# EAGLE board Ex Pin Expander (EAGLE 7.4.0)
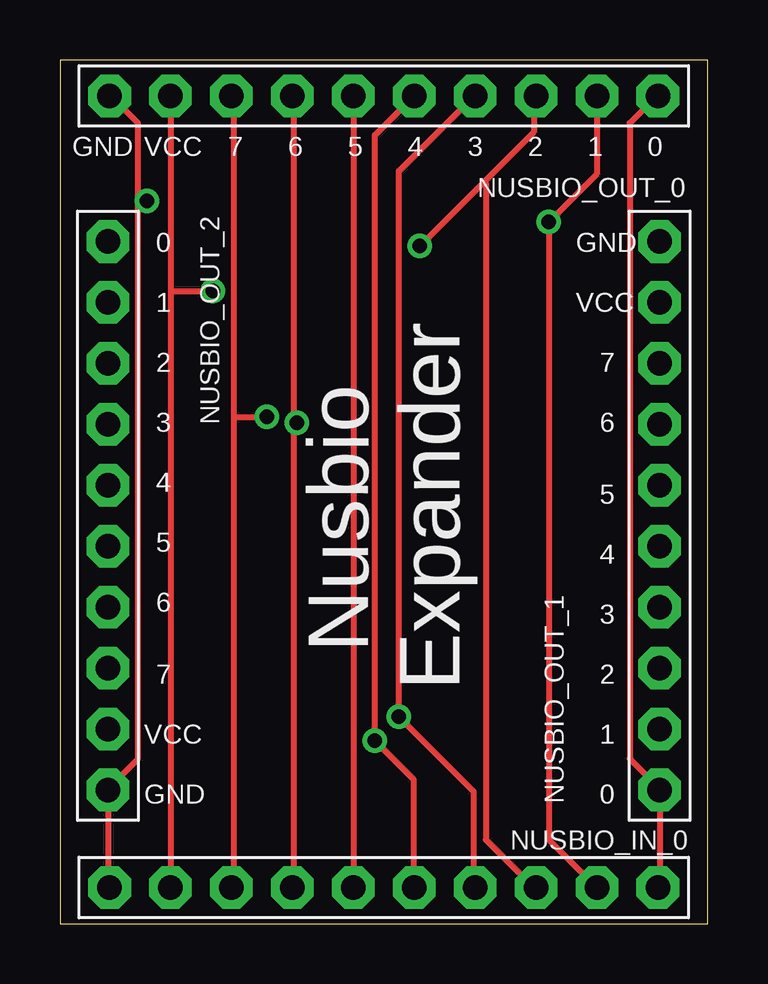
[diagram p0: board, top side]
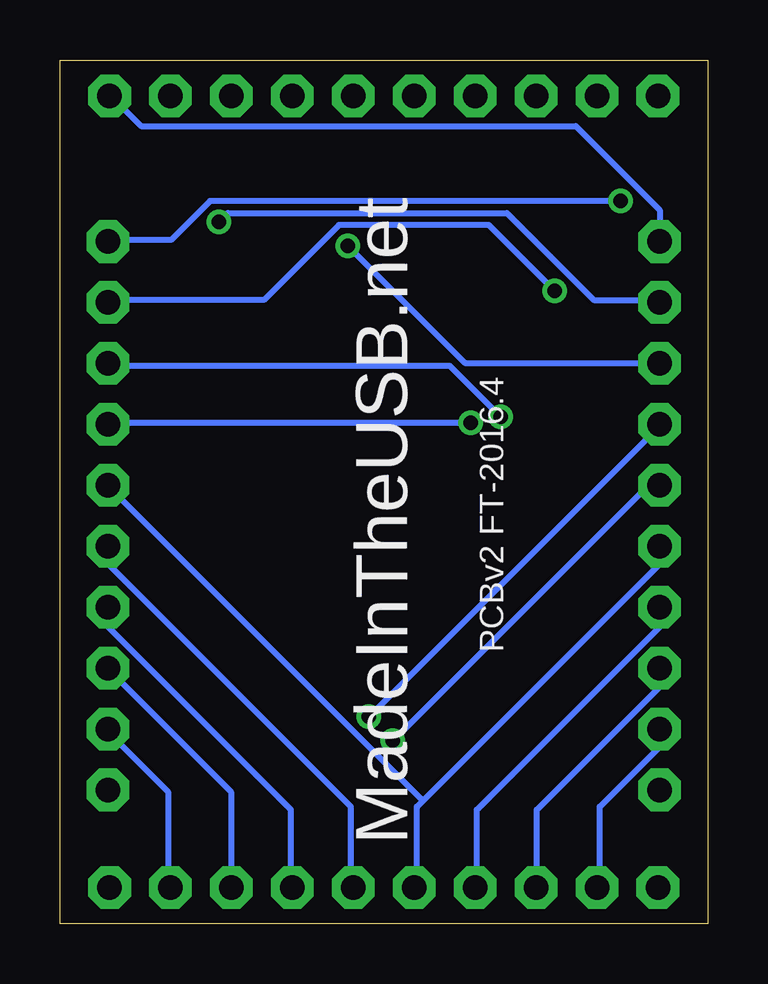
[diagram p1: board, bottom side, seen from below]

Size 27 x 36 mm. Coordinates in mm from the lower left corner, seen from the top.
Outline: 0,0 27,0 27,36 0,36 0,0
Copper layers (1*16): Top 0.035mm / dielectric 1.5mm / Bottom 0.035mm
Design rules "default": minimum track width 10mil, minimum drill 24mil, track to track 8mil, track to pad 8mil, pad to pad 8mil, via to via 8mil, smd to smd 8mil, copper to edge 40mil, drill to drill 8mil, minimum pad ring 10mil, minimum via ring 8mil, stop-mask expansion 4mil, vias tented up to drill 0mil, thermal gap 10mil

## Footprints (pad centres in the part's own frame; a part is rotated, then mirrored left to right if it is on the bottom)
1X10-BIG = drill 1.016 pad 1.778 octagon: 1 -11.43,0; 2 -8.89,0; 3 -6.35,0; 4 -3.81,0; 5 -1.27,0; 6 1.27,0; 7 3.81,0; 8 6.35,0; 9 8.89,0; 10 11.43,0

## Placement (x,y rotation side)
NUSBIO_IN_0  PINHD-1X10  [1X10-BIG]  13.5,1.5 180 top
NUSBIO_OUT_0  PINHD-1X10  [1X10-BIG]  13.5,34.5 180 top
NUSBIO_OUT_1  PINHD-1X10  [1X10-BIG]  25,17 90 top
NUSBIO_OUT_2  PINHD-1X10  [1X10-BIG]  2,17 270 top

## Library data of the parts
NUSBIO_IN_0 NUSBIO_OUT_0 NUSBIO_OUT_1 NUSBIO_OUT_2 = adafruit

## Nets
N$1: NUSBIO_IN_0.10 NUSBIO_OUT_0.10 NUSBIO_OUT_1.10 NUSBIO_OUT_2.10
N$2: NUSBIO_IN_0.9 NUSBIO_OUT_0.9 NUSBIO_OUT_1.9 NUSBIO_OUT_2.9
N$3: NUSBIO_IN_0.8 NUSBIO_OUT_0.8 NUSBIO_OUT_1.8 NUSBIO_OUT_2.8
N$4: NUSBIO_IN_0.7 NUSBIO_OUT_0.7 NUSBIO_OUT_1.7 NUSBIO_OUT_2.7
N$5: NUSBIO_IN_0.6 NUSBIO_OUT_0.6 NUSBIO_OUT_1.6 NUSBIO_OUT_2.6
N$6: NUSBIO_IN_0.5 NUSBIO_OUT_0.5 NUSBIO_OUT_1.5 NUSBIO_OUT_2.5
N$7: NUSBIO_IN_0.4 NUSBIO_OUT_0.4 NUSBIO_OUT_1.4 NUSBIO_OUT_2.4
N$8: NUSBIO_IN_0.3 NUSBIO_OUT_0.3 NUSBIO_OUT_1.3 NUSBIO_OUT_2.3
N$9: NUSBIO_IN_0.2 NUSBIO_OUT_0.2 NUSBIO_OUT_1.2 NUSBIO_OUT_2.2
N$10: NUSBIO_IN_0.1 NUSBIO_OUT_0.1 NUSBIO_OUT_1.1 NUSBIO_OUT_2.1

## Tracks (layer width: path | path; a pad name or v marks a point on that pad's centre or on a via)
N$1  (via drill 0.61)
  Top 0.254: NUSBIO_IN_0.10 2,1.5 NUSBIO_OUT_2.10 2,5.62 3.25,6.88 3.25,30.12 | 3.25,30.12 3.25,33.38 2.12,34.5 NUSBIO_OUT_0.10 | 3.25,30.12 v3.62,30.12
  Bottom 0.254: v3.62,30.12 20.75,30.12 22.38,28.5 25,28.5 NUSBIO_OUT_1.10
N$2  (via drill 0.61)
  Top 0.254: 4.62,26.38 4.62,1.5 NUSBIO_IN_0.9 | 4.62,26.38 4.62,34.5 NUSBIO_OUT_0.9 | 4.62,26.38 v6.38,26.38
  Bottom 0.254: NUSBIO_OUT_2.9 2,7.38 4.5,4.88 4.5,1.5 NUSBIO_IN_0.9 | v6.38,26.38 9.12,29.12 15.38,29.12 18.5,26 25,26 NUSBIO_OUT_1.9
N$3  (via drill 0.61)
  Top 0.254: 7.25,21.12 7.25,1.5 NUSBIO_IN_0.8 | 7.25,21.12 7.25,34.5 NUSBIO_OUT_0.8 | 7.25,21.12 v8.62,21.12
  Bottom 0.254: NUSBIO_OUT_2.8 2,9.88 7.12,4.75 7.12,1.5 NUSBIO_IN_0.8 | v8.62,21.12 10.75,23.25 25,23.25 NUSBIO_OUT_1.8
N$4  (via drill 0.61)
  Top 0.254: 9.75,20.88 9.75,1.5 NUSBIO_IN_0.7 | 9.75,20.88 9.75,34.5 NUSBIO_OUT_0.7 | v9.88,20.88 9.75,20.88
  Bottom 0.254: NUSBIO_OUT_2.7 2,12.38 9.62,4.75 9.62,1.5 NUSBIO_IN_0.7 | v9.88,20.88 25,20.88 NUSBIO_OUT_1.7
N$5
  Top 0.254: NUSBIO_OUT_0.6 12.25,34.5 12.25,1.5 NUSBIO_IN_0.6
  Bottom 0.254: NUSBIO_OUT_2.6 2,15 11.88,5.12 | 11.88,5.12 12.12,4.88 12.12,1.5 NUSBIO_IN_0.6 | 11.88,5.12 25,18.25 NUSBIO_OUT_1.6
N$6  (via drill 0.61)
  Top 0.254: NUSBIO_IN_0.5 14.75,1.5 14.75,6 v13.12,7.62 13.12,32.88 14.75,34.5 NUSBIO_OUT_0.5
  Bottom 0.254: v13.12,7.62 2.5,18.25 2,18.25 NUSBIO_OUT_2.5 | NUSBIO_OUT_1.5 25,15 14.88,4.88 14.88,1.5 NUSBIO_IN_0.5
N$7  (via drill 0.61)
  Top 0.254: NUSBIO_IN_0.4 17.25,1.5 17.25,5.5 v14.12,8.62 14.12,31.38 17.25,34.5 NUSBIO_OUT_0.4
  Bottom 0.254: v14.12,8.62 2,20.75 NUSBIO_OUT_2.4 | NUSBIO_OUT_1.4 25,12.38 17.38,4.75 17.38,1.5 NUSBIO_IN_0.4
N$8  (via drill 0.61)
  Top 0.254: 17.69,30.94 19.75,33 19.75,34.5 NUSBIO_OUT_0.3 | 17.69,30.94 v15,28.25 | NUSBIO_IN_0.3 19.75,1.5 17.75,3.5 17.75,30.88 17.69,30.94
  Bottom 0.254: NUSBIO_IN_0.3 19.88,1.5 19.88,5.5 25,10.62 NUSBIO_OUT_1.3 | v15,28.25 10.12,23.38 2,23.38 NUSBIO_OUT_2.3
N$9  (via drill 0.61)
  Top 0.254: NUSBIO_OUT_0.2 22.38,34.5 22.38,31.25 v20.38,29.25 20.38,3.5 22.38,1.5 NUSBIO_IN_0.2
  Bottom 0.254: NUSBIO_IN_0.2 22.5,1.5 22.5,5.5 25,8 NUSBIO_OUT_1.2 | v20.38,29.25 20,29.62 8.38,29.62 4.75,26 2,26 NUSBIO_OUT_2.2
N$10
  Top 0.254: NUSBIO_IN_0.1 25,1.5 NUSBIO_OUT_1.1 25,5.62 23.75,6.88 23.75,33.38 24.88,34.5 NUSBIO_OUT_0.1
  Bottom 0.254: NUSBIO_OUT_2.1 2,29.75 5.5,33.25 23.62,33.25 24.88,34.5 NUSBIO_OUT_0.1

## Text on the board
tNames: GND | VCC | 7 | 6 | 5 | 4 | 3 | 2 | 1 | 0 | 0 | GND | 1 | VCC | 2 | 7 | 3 | 6 | 4 | 5 | Nusbio / Expander | 5 | 4 | 6 | 3 | 7 | 2 | VCC | 1 | GND | 0
bNames: PCBv2 FT-2016.4 | MadeInTheUSB.net